# Altium PCB xem7310_carrier.PcbDoc
Units mm, origin at the board's own origin, x right, y up, seen from the top; angles counter-clockwise.
Board outline 72.85 x 75 mm, 4 copper layers (F.Cu, In1.Cu, In2.Cu, B.Cu); 26 components, 183 nets, 251 pads, 53 vias.
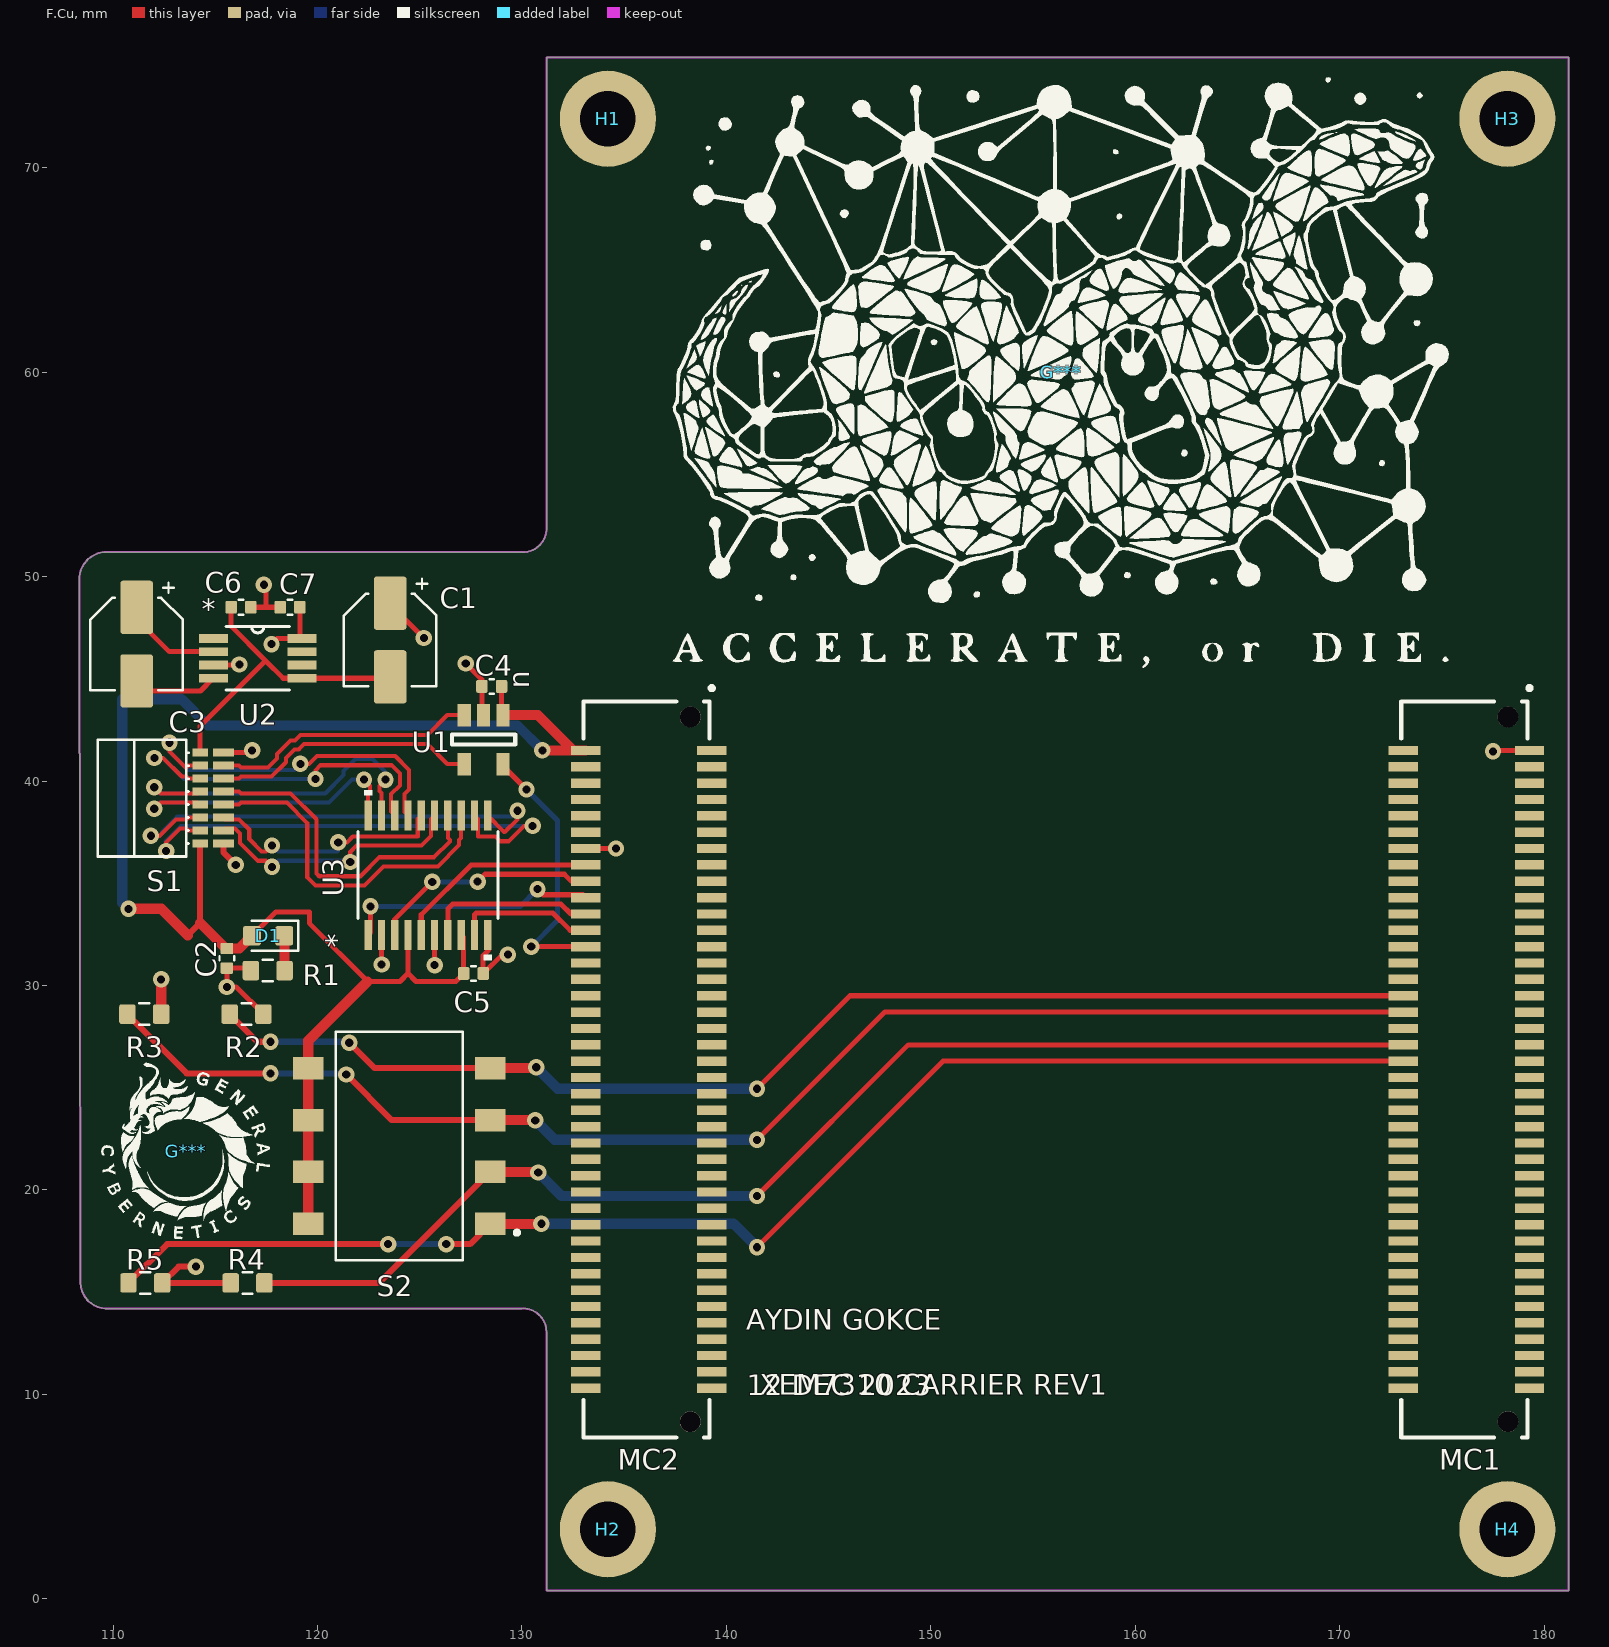
[diagram p0: F.Cu view]
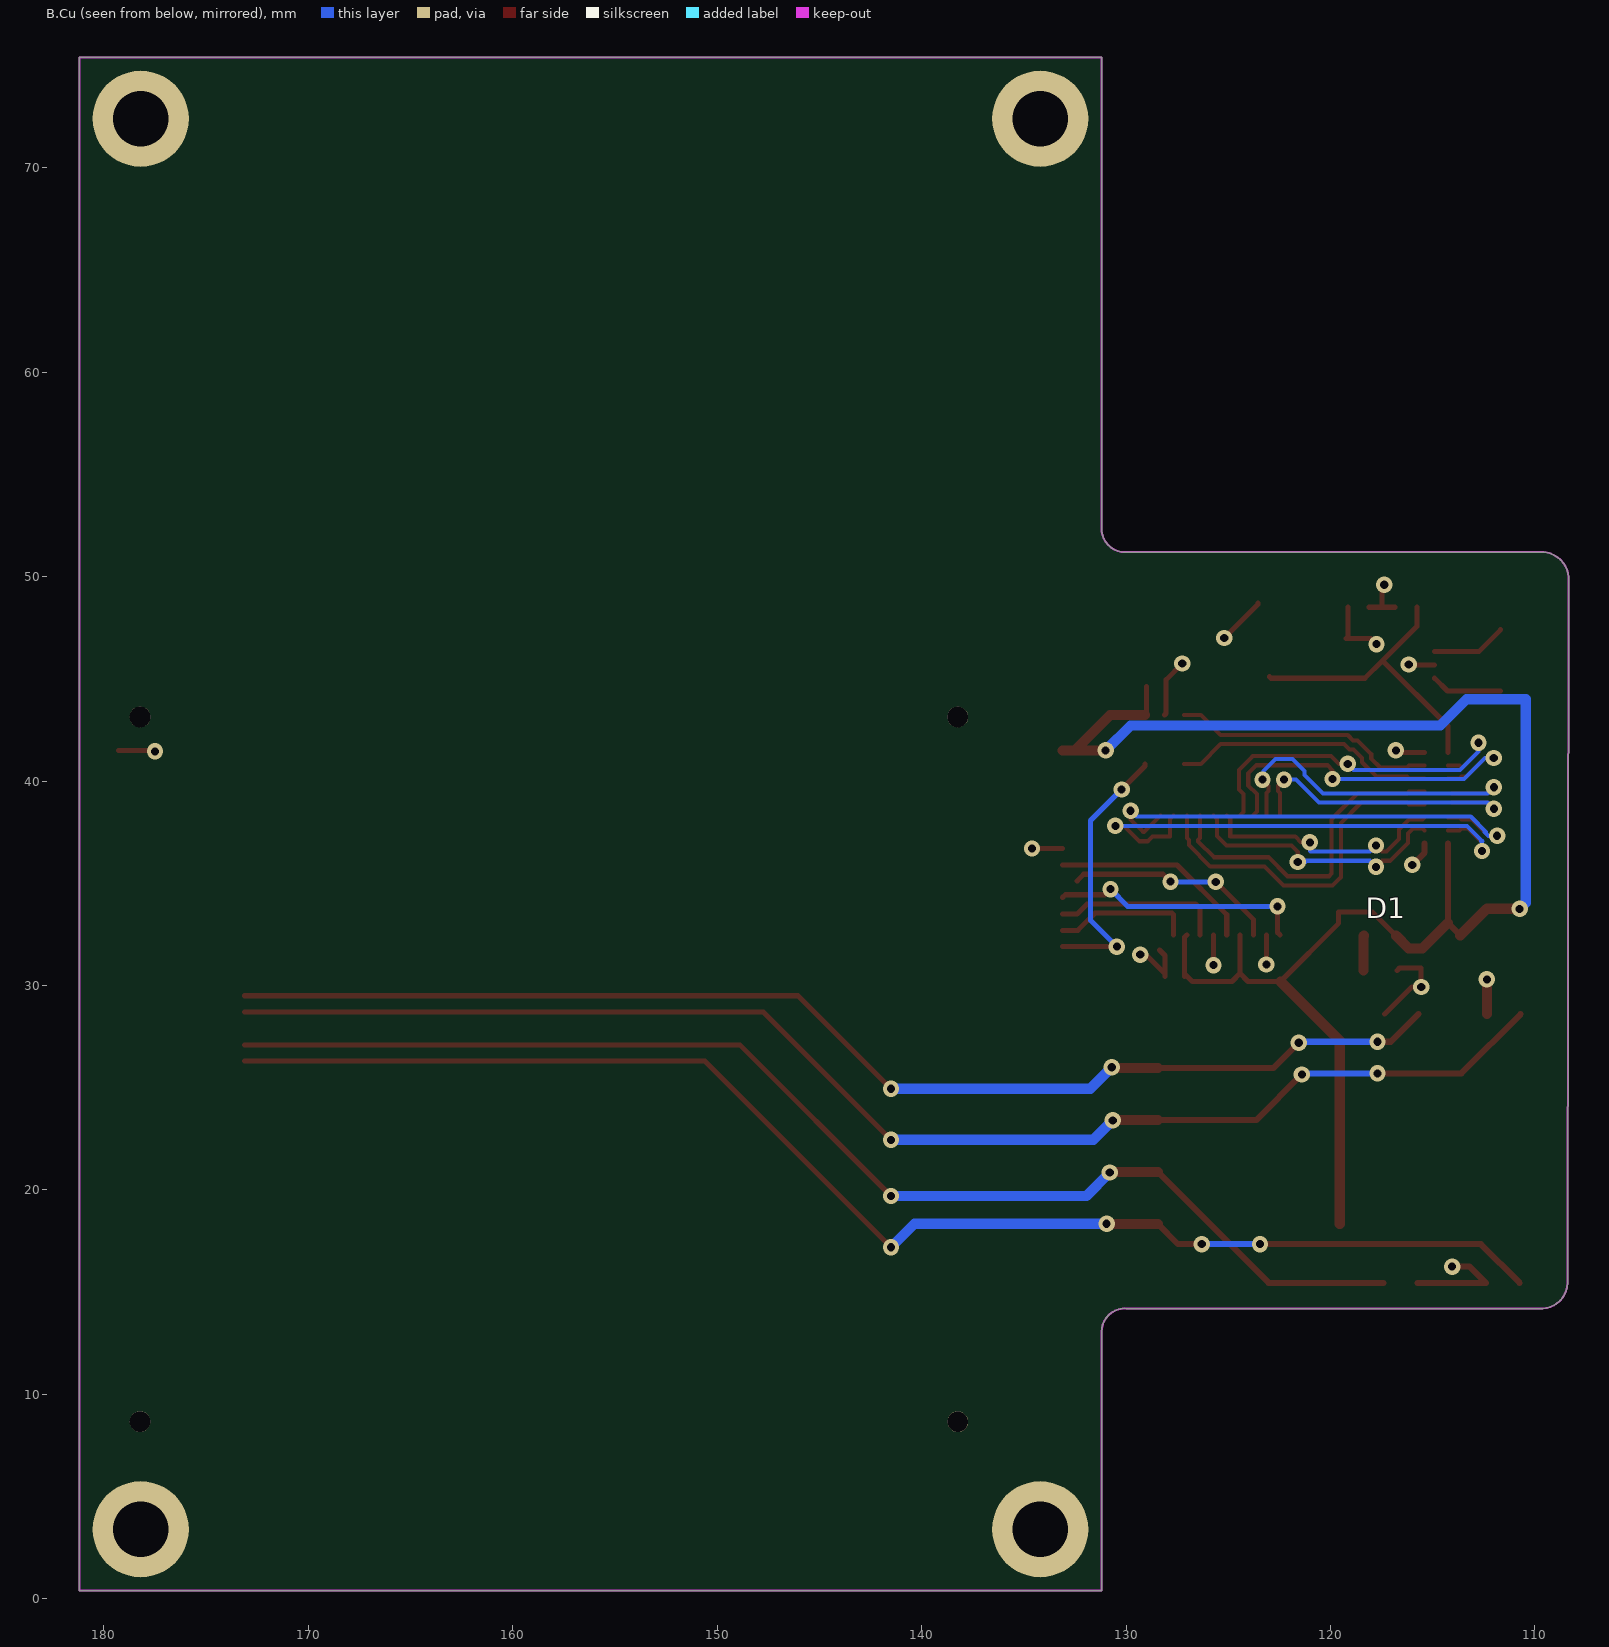
[diagram p1: B.Cu view, seen from below]
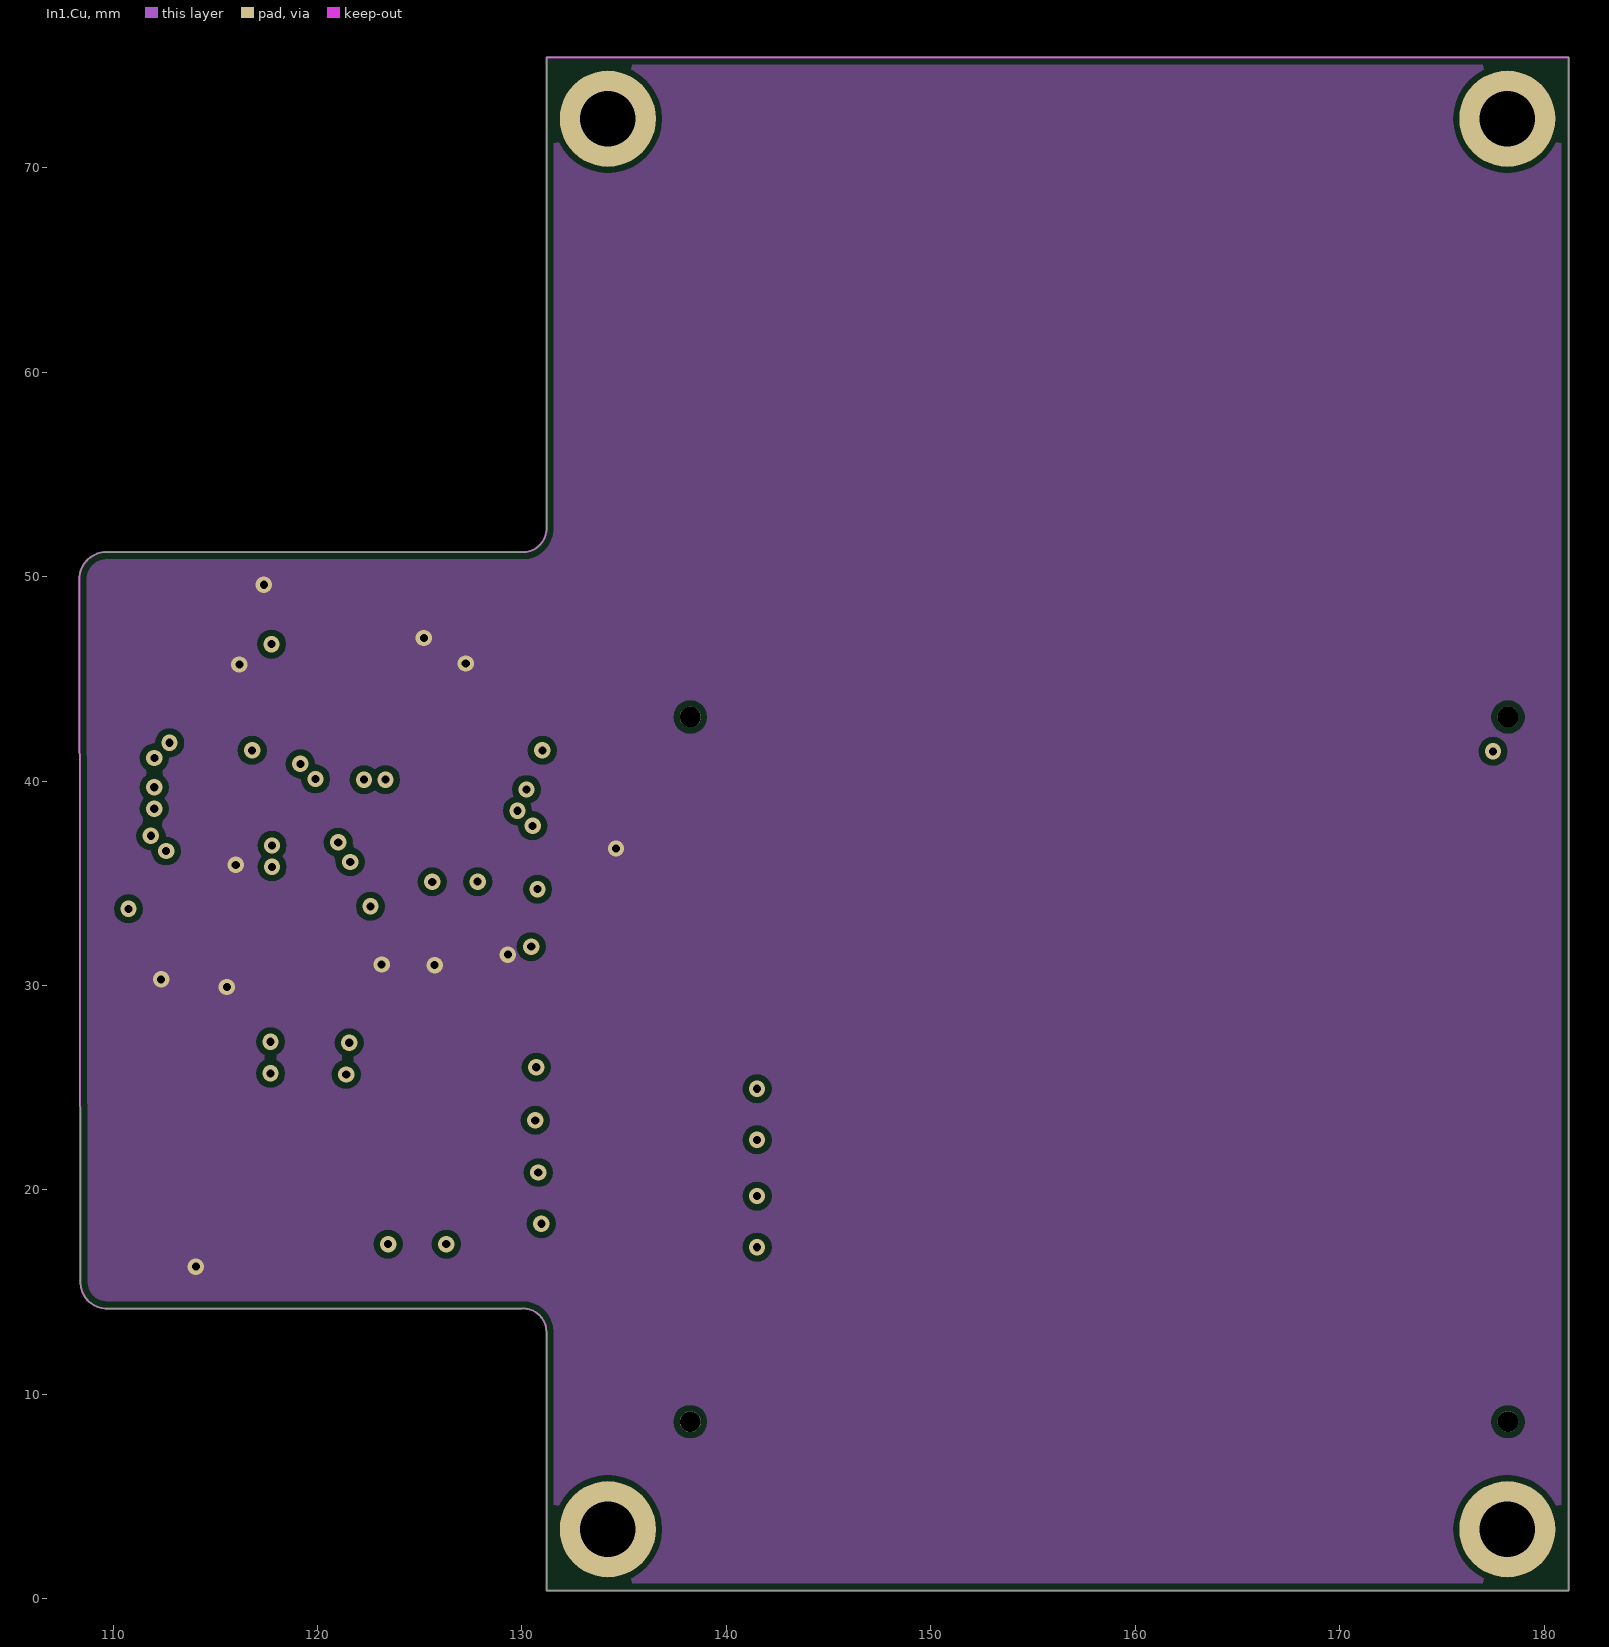
[diagram p2: In1.Cu]
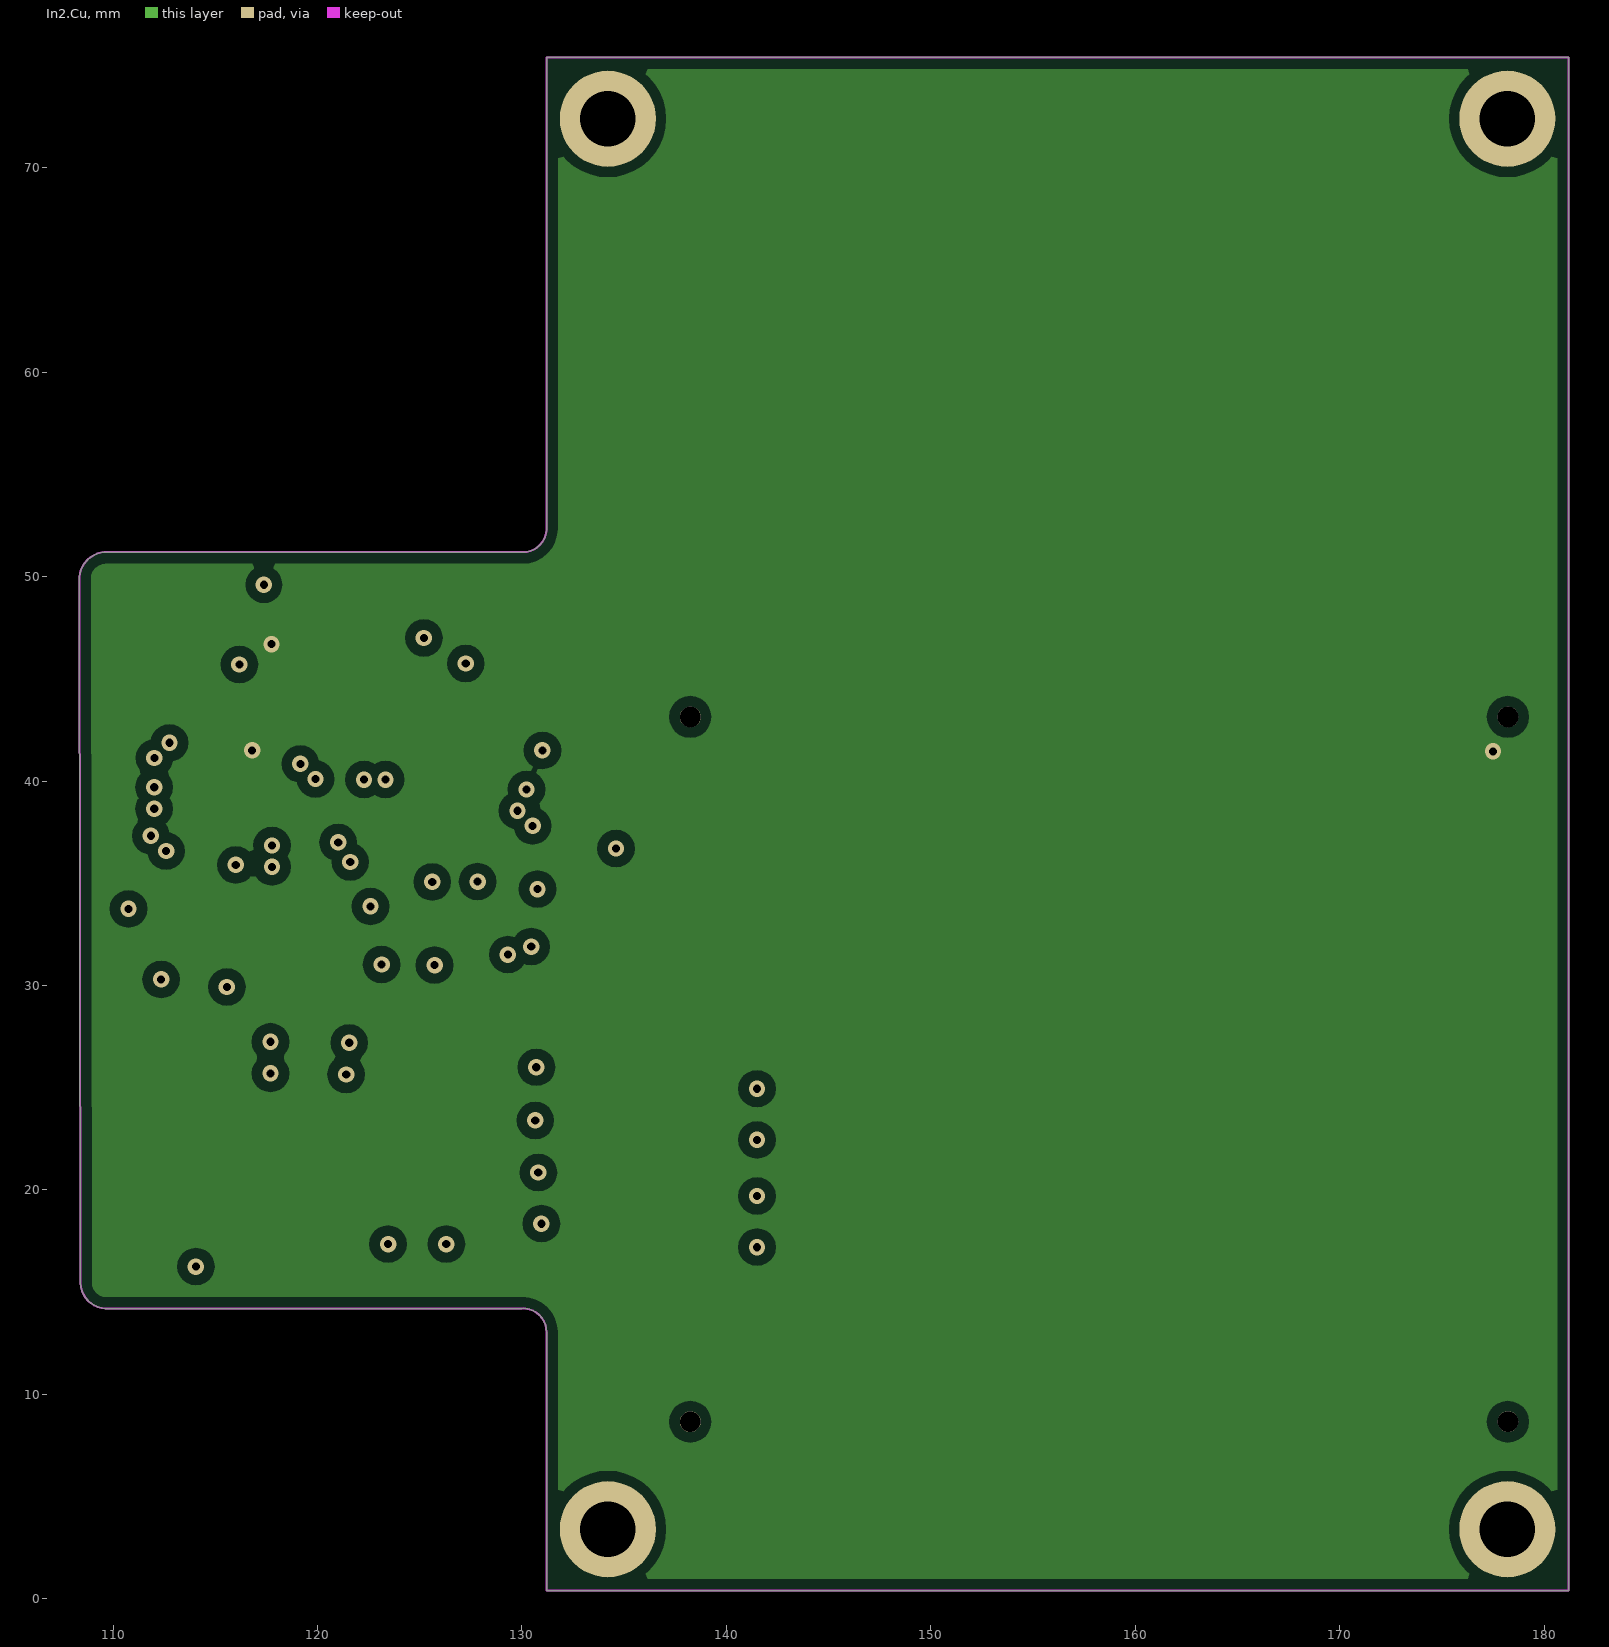
[diagram p3: In2.Cu]

## Layer stack, top to bottom
F.Mask: solder mask 0.0102, Solder Resist, Dk 3.5
F.Cu: signal copper 0.0356
Dielectric 1: dielectric 0.32, FR-4, Dk 4.8
In1.Cu: signal copper 0.0356
Dielectric2: dielectric 0.32, FR-4, Dk 4.8
In2.Cu: signal copper 0.0356
Dielectric3: dielectric 0.32, FR-4, Dk 4.8
B.Cu: signal copper 0.0356
B.Mask: solder mask 0.0102, Solder Resist, Dk 3.5

## Board outline
130.05,51.199 ccw(c130.05,52.35) 131.2,52.4 131.2,75.4 181.2,75.4 181.2,0.4 131.2,0.4 131.2,13.049 ccw(c130.047,13.049) 110.21,14.2 109.61,14.2 cw(c109.691,15.489) 108.4,15.435 108.35,49.99 cw(c109.68,49.868) 109.585,51.2 109.935,51.2 110.285,51.2 130.05,51.199

## Design rules (kind name [scope] priority, off if disabled: settings)
Clearance "Clearence 0.508_Polygon" [InNamedPolygon('In2.Cu-+5V')] p1: gap=0.508 ignorepadtopadclearanceinfootprint=FALSE
Clearance "Clearence 0.3_Polygon" [InNamedPolygon('In1.Cu-GND')] p2: gap=0.3 ignorepadtopadclearanceinfootprint=FALSE
MinimumSolderMaskSliver [All] p1: minsoldermaskwidth=0
PolygonConnect Polygon_In2.Cu-+5V_ConnectDirect [IsNamedPolygon('In2.Cu-+5V') vs IsVia] p1: connectstyle=Direct reliefconductorwidth=0.254 reliefentries=4 polygonreliefangle="90 Angle" airgapwidth=0.254
PolygonConnect Polygon_In2.Cu-+5V_ConnectRelief45 [IsNamedPolygon('In2.Cu-+5V') vs (IsThruPin or IsSMTPin) and (PadShape_AllLayers = 'Round')] p2: connectstyle=Relief reliefconductorwidth=0.508 reliefentries=4 polygonreliefangle="45 Angle" airgapwidth=0.508
PolygonConnect Polygon_In2.Cu-+5V_ConnectRelief90 [IsNamedPolygon('In2.Cu-+5V') vs (IsThruPin or IsSMTPin) and (PadShape_AllLayers <> 'Round')] p3: connectstyle=Relief reliefconductorwidth=0.508 reliefentries=4 polygonreliefangle="90 Angle" airgapwidth=0.508
PolygonConnect Polygon_In1.Cu-GND_ConnectDirect [IsNamedPolygon('In1.Cu-GND') vs IsVia] p4: connectstyle=Direct reliefconductorwidth=0.254 reliefentries=4 polygonreliefangle="90 Angle" airgapwidth=0.254
PolygonConnect Polygon_In1.Cu-GND_ConnectRelief45 [IsNamedPolygon('In1.Cu-GND') vs (IsThruPin or IsSMTPin) and (PadShape_AllLayers = 'Round')] p5: connectstyle=Relief reliefconductorwidth=0.5 reliefentries=4 polygonreliefangle="45 Angle" airgapwidth=0.5
PolygonConnect Polygon_In1.Cu-GND_ConnectRelief90 [IsNamedPolygon('In1.Cu-GND') vs (IsThruPin or IsSMTPin) and (PadShape_AllLayers <> 'Round')] p6: connectstyle=Relief reliefconductorwidth=0.5 reliefentries=4 polygonreliefangle="90 Angle" airgapwidth=0.5
RoutingVias [All] p1: holewidth=0.711 width=1.27 viastyle="Through Hole" minholewidth=0.711 minwidth=1.27 maxholewidth=0.711 maxwidth=1.27
SilkToSilkClearance [All] p1: silktosilkclearance=0
SilkToSolderMaskClearance [IsPad] p1: minsilkscreentomaskgap=0 clearancetoexposedcopper=TRUE
SolderMaskExpansion [All] p1: expansion=0.102 istentingtop=FALSE
Width [All] p1: maxlimit=10 minlimit=0.254 preferedwidth=0.254 minimp=50.000000 maximp=50.000000 favimp=50.000000
27 further rules are at their usual default settings.

## Components (designator, comment, footprint, x,y, rotation, side; value= is the part's Value field where it differs from the comment)
C1 "10u" CP_Elec_4x5.4 123.55,46.9 r270 top
C2 "0.1u" C_0402_1005Metric 115.565,31.33 r90 top
C3 "10u" CP_Elec_4x5.4 111.15,46.7 r270 top
C4 "0.1u" C_0402_1005Metric 128.52,44.63 r180 top
C5 "0.1u" C_0402_1005Metric 127.63,30.59 r180 top
C6 "0.1u" C_0402_1005Metric 116.255,48.505 r180 top
C7 "0.1u" C_0402_1005Metric 118.655,48.505 r0 top
D1 "LED_0603" LED_0603_1608Metric 117.577,32.43 r180 top
G*** "LOGO" LOGO 156.35,60 r0 top
G*** "LOGO" LOGO 113.55,21.9 r0 top
H1 "MountingHole_Pad" MountingHole_2.7mm_M2.5_DIN965_Pad 134.2,72.4 r0 top
H2 "MountingHole_Pad" MountingHole_2.7mm_M2.5_DIN965_Pad 134.2,3.4 r0 top
H3 "MountingHole_Pad" MountingHole_2.7mm_M2.5_DIN965_Pad 178.2,72.4 r0 top
H4 "MountingHole_Pad" MountingHole_2.7mm_M2.5_DIN965_Pad 178.2,3.4 r0 top
MC1 "BTE-040-01-F-D-A" SAMTEC_BTE-040-01-F-D-A 176.198,25.898 r270 top
MC2 "BTE-040-01-F-D-A" SAMTEC_BTE-040-01-F-D-A 136.198,25.898 r270 top
R1 "680" R_0603_1608Metric 117.565,30.73 r180 top
R2 "50K" R_0603_1608Metric 116.525,28.6 r0 top
R3 "50K" R_0603_1608Metric 111.525,28.6 r0 top
R4 "50K" R_0603_1608Metric 116.575,15.45 r180 top
R5 "50K" R_0603_1608Metric 111.575,15.45 r0 top
S1 "RHS2000-CABLE-DAQ-SIDE" OMNETICS_PZN-16-AA 113.242,39.17 r90 top
S2 "DS04-254-1-04BK-SMT" SW_DS04-254-1-04BK-SMT 124,22.15 r180 top
U1 "SN65LVDT2DBVR" DBV0005A_N 128.12,42.03 r270 top
U2 "TL7660CDGKR" DGK8 117.075,46.005 r0 top
U3 "SN65LVDT41PW" PW20 125.4,35.4 r90 top

## Footprints (in the part's own frame and the unit in brackets; to place one, negate y for a bottom-side part, rotate by r counter-clockwise, add the part's x,y. Pads: shape width x height; smd on the part's side, far side on the other; paste and mask are expansions set on the pad)
C_0402_1005Metric [mm]
  rrect25% 0.56x0.62 smd mask+0: 1(-0.48,0) 2(0.48,0)
  silkscreen extent -0.11,-0.36 0.11,0.36
CP_Elec_4x5.4 [mm]
  rrect16% 2.6x1.6 smd mask+0: 1(-1.8,0) 2(1.8,0)
  silkscreen extent -3,-2.26 2.26,2.26
DBV0005A_N [mm]
  rect 1.1x0.65 smd mask+0: 1(-1.2,0.95) 2(-1.2,0) 3(-1.2,-0.95) 4(1.2,-0.95) 5(1.2,0.95)
  silkscreen extent -0.25,-1.55 0.25,1.55
DGK8 [mil]
  rect 56x17 smd mask+0: 1(-85.5,38.39) 2(-85.5,12.8) 3(-85.5,-12.8) 4(-85.5,-38.39) 5(85.5,-38.39) 6(85.5,-12.8) 7(85.5,12.8) 8(85.5,38.39)
  silkscreen extent -61,-61 61,61
LED_0603_1608Metric [mm]
  rrect25% 0.875x0.95 smd mask+0: 1(-0.787,0) 2(0.787,0)
  silkscreen extent -1.49,-0.73 0.8,0.73
LOGO [mm]
  silkscreen extent -18.97,-14.45 18.98,14.42
MountingHole_2.7mm_M2.5_DIN965_Pad [mm]
  round 4.7 hole 2.7 paste-2539.97 mask+0: 1(0,0)
OMNETICS_PZN-16-AA [mil]
  rect 15x30 smd mask+4.02: B1(87.5,-40) B2(62.5,-40) B3(37.5,-40) B4(12.5,-40) B5(-12.5,-40) B6(-37.5,-40) B7(-62.5,-40) B8(-87.5,-40)
  rect 15x40 smd mask+4.02: T1(87.5,-85) T2(62.5,-85) T3(37.5,-85) T4(12.5,-85) T5(-12.5,-85) T6(-37.5,-85) T7(-62.5,-85) T8(-87.5,-85)
  silkscreen extent -113,-18 112,157
PW20 [mm]
  rect 1.462x0.355 smd mask+0: 1(-2.921,2.925) 2(-2.921,2.275) 3(-2.921,1.625) 4(-2.921,0.975) 5(-2.921,0.325) 6(-2.921,-0.325) 7(-2.921,-0.975) 8(-2.921,-1.625) 9(-2.921,-2.275) 10(-2.921,-2.925) 11(2.921,-2.925) 12(2.921,-2.275) 13(2.921,-1.625) 14(2.921,-0.975) 15(2.921,-0.325) 16(2.921,0.325) 17(2.921,0.975) 18(2.921,1.625) 19(2.921,2.275) 20(2.921,2.925)
  silkscreen extent -4.16,-3.43 4.16,3.43
R_0603_1608Metric [mm]
  rrect25% 0.8x0.95 smd mask+0: 1(-0.825,0) 2(0.825,0)
  silkscreen extent -0.24,-0.52 0.24,0.52
SAMTEC_BTE-040-01-F-D-A [mm]
  rect 0.457x1.44 smd mask+0.102: 01(-15.6,3.086) 02(-15.6,-3.086) 03(-14.8,3.086) 04(-14.8,-3.086) 05(-14,3.086) 06(-14,-3.086) 07(-13.2,3.086) 08(-13.2,-3.086) 09(-12.4,3.086) 10(-12.4,-3.086) 11(-11.6,3.086) 12(-11.6,-3.086) 13(-10.8,3.086) 14(-10.8,-3.086) 15(-10,3.086) 16(-10,-3.086) 17(-9.2,3.086) 18(-9.2,-3.086) 19(-8.4,3.086) 20(-8.4,-3.086) 21(-7.6,3.086) 22(-7.6,-3.086) 23(-6.8,3.086) 24(-6.8,-3.086) 25(-6,3.086) 26(-6,-3.086) 27(-5.2,3.086) 28(-5.2,-3.086) 29(-4.4,3.086) 30(-4.4,-3.086) 31(-3.6,3.086) 32(-3.6,-3.086) 33(-2.8,3.086) 34(-2.8,-3.086) 35(-2,3.086) 36(-2,-3.086) 37(-1.2,3.086) 38(-1.2,-3.086) 39(-0.4,3.086) 40(-0.4,-3.086) 41(0.4,3.086) 42(0.4,-3.086) 43(1.2,3.086) 44(1.2,-3.086) 45(2,3.086) 46(2,-3.086) 47(2.8,3.086) 48(2.8,-3.086) 49(3.6,3.086) 50(3.6,-3.086) 51(4.4,3.086) 52(4.4,-3.086) 53(5.2,3.086) 54(5.2,-3.086) 55(6,3.086) 56(6,-3.086) 57(6.8,3.086) 58(6.8,-3.086) 59(7.6,3.086) 60(7.6,-3.086) 61(8.4,3.086) 62(8.4,-3.086) 63(9.2,3.086) 64(9.2,-3.086) 65(10,3.086) 66(10,-3.086) 67(10.8,3.086) 68(10.8,-3.086) 69(11.6,3.086) 70(11.6,-3.086) 71(12.4,3.086) 72(12.4,-3.086) 73(13.2,3.086) 74(13.2,-3.086) 75(14,3.086) 76(14,-3.086) 77(14.8,3.086) 78(14.8,-3.086) 79(15.6,3.086) 80(15.6,-3.086)
  round 1.016 hole 1.016 paste-2539.97 mask+0: Un1(-17.238,2.032) Un2(17.238,2.032)
  silkscreen extent -18.75,-3.19 18,3.19
SW_DS04-254-1-04BK-SMT [mm]
  rect 1.5x1.1 smd mask+0.102: 1A(-4.45,3.81) 1B(4.45,3.81) 2A(-4.45,1.27) 2B(4.45,1.27) 3A(-4.45,-1.27) 3B(4.45,-1.27) 4A(-4.45,-3.81) 4B(4.45,-3.81)
  silkscreen extent -5.85,-5.58 3.1,5.58

## Part data
C1 C3: library part CP_Elec_4x5.4, "SMD capacitor, aluminum electrolytic, Panasonic A5 / Nichicon, 4.0x5.4mm", Sheetfile=xem7310_carrier.kicad_sch
C2 C4 C5 C6 C7: library part C_0402_1005Metric, "Capacitor SMD 0402 (1005 Metric), square (rectangular) end terminal, IPC_7351 nominal, (Body size source: IPC-SM-782 page 76, https://www.pcb-3d.com/wordpress/wp-content/uploads/ipc-sm-782a_amendment_1_and_2.pdf), generated with kicad-footprint-generator", Sheetfile=xem7310_carrier.kicad_sch
D1: library part LED_0603_1608Metric, "LED SMD 0603 (1608 Metric), square (rectangular) end terminal, IPC_7351 nominal, (Body size source: http://www.tortai-tech.com/upload/download/2011102023233369053.pdf), generated with kicad-footprint-generator", Sheetfile=xem7310_carrier.kicad_sch
H1 H2 H3 H4: library part MountingHole_2.7mm_M2.5_DIN965_Pad, "Mounting Hole 2.7mm, M2.5, DIN965", Sheetfile=xem7310_carrier.kicad_sch
MC1 MC2: library part SAMTEC_BTE-040-01-F-D-A, MANUFACTURER=Samtec, PARTREV=R, STANDARD="Manufacturer Recommendations", Sheetfile=xem7310_carrier.kicad_sch
R1 R2 R3 R4 R5: library part R_0603_1608Metric, "Resistor SMD 0603 (1608 Metric), square (rectangular) end terminal, IPC_7351 nominal, (Body size source: IPC-SM-782 page 72, https://www.pcb-3d.com/wordpress/wp-content/uploads/ipc-sm-782a_amendment_1_and_2.pdf), generated with kicad-footprint-generator", Sheetfile=xem7310_carrier.kicad_sch
S1: library part OMNETICS_PZN-16-AA, Sheetfile=xem7310_carrier.kicad_sch
S2: library part SW_DS04-254-1-04BK-SMT, MANUFACTURER="CUI Inc.", MAXIMUM_PACKAGE_HEIGHT="4.86 mm", Package=None, Availability="In Stock", CUI_purchase_URL=https://www.cuidevices.com/product/switches/dip-switches/ds04-254-1-04bk-smt?utm_source=snapeda.com&utm_medium=referral&utm_campaign=snapedaBOM, Check_prices=https://www.snapeda.com/parts/DS04-254-1-04BK-SMT/CUI+Devices/view-part/?ref=eda, Description="4 Position, Surface Mount, 2.54 mm Pitch, Raised Slide Actuator, Flat Bottom, SMT Pin, DIP Switch", MF="CUI Devices", MP=DS04-254-1-04BK-SMT, PARTREV=V0.0, Price=None, Purchase-URL="https://www.snapeda.com/api/url_track_click_mouser/?unipart_id=4467256&manufacturer=CUI Devices&part_name=DS04-254-1-04BK-SMT&search_term=None", STANDARD="Manufacturer Recommendations", Sheetfile=xem7310_carrier.kicad_sch, SnapEDA_Link=https://www.snapeda.com/parts/DS04-254-1-04BK-SMT/CUI+Devices/view-part/?ref=snap
U1: library part DBV0005A_N, Sheetfile=xem7310_carrier.kicad_sch
U2: library part DGK8, Sheetfile=xem7310_carrier.kicad_sch
U3: library part PW20, Sheetfile=xem7310_carrier.kicad_sch

## Via types
v1: diameter 0.8, hole 0.4, F.Cu to B.Cu, tented both sides, 53 vias

## Nets (pads, with @x,y where several pads share a name; then routed paths per layer and width w, separated by ;. In a path a pad name is that pad's centre, name@x,y a point inside that pad or via, vN(x,y) a via of type N, cw(c..) or ccw(c..) an arc to the next point about the centre after c; other vN are vias at no path point)
+3.3V: C2.2 C4.1 C5.2 D1.2 MC2.02 S1.B8 S2.1B S2.2B S2.3B S2.4B U1.1 U3.4 U3.8 | length 81.8
  F.Cu w0.25: D1.2 117.96,33.6 119.6,33.6 119.6,33.05 122.45,30.2 124.03,30.2 124.425,30.595 ; U3.4 124.425,30.595 ; U3.8 127.14,32.364 C5.2@127.14,30.45 ; C5.2 126.76,30.2 124.82,30.2 124.425,30.595 ; C4.1 129,43.3 U1.1
  F.Cu w0.3: 113.65,32.45 114.258,33.058 S1.B8
  F.Cu w0.5: v1(110.75,33.75) 112.35,33.75 113.65,32.45 ; 114.258,33.058 115.506,31.81 C2.2 116.17,31.81 D1.2 ; S2.1B S2.4B 119.55,27.3 122.45,30.2 ; U1.1 130.77,43.23 132.502,41.498 MC2.02 131.002,41.498 v1(131,41.5)
  B.Cu w0.5: v1(110.75,33.75) 110.45,34.05 110.45,44 113.35,44 114.629,42.721 129.779,42.721 v1(131,41.5)
+5V: C7.2 MC1.01 S1.T1 U2.8 | length 6.4
  F.Cu w0.25: S1.T1 116.692,41.393 v1(116.8,41.5) ; v1(117.75,46.7) 118.03,46.98 U2.8 ; U2.8@119.135,46.972 C7.2 ; v1(177.5,41.45) 177.548,41.498 MC1.01
-5V: C1.2 C6.2 S1.B1 U2.5 | length 15
  F.Cu w0.25: S1.B1 114.258,42.688 117.46,45.89 ; C6.2 115.775,47.575 117.46,45.89 ; C1.2@122.975,45.105 122.9,45.03 U2.5 118.32,45.03 117.46,45.89
CS+: S1.T6 U3.16 | length 12.4
  F.Cu w0.2: S1.T6 115.494,38.125 116.159,38.125 116.659,37.624 116.659,37.159 117.267,36.551 117.475,36.551 v1(117.775,36.851) ; v1(121.009,37.001) 121.433,37.001 121.722,37.29 123.948,37.29 ; 123.948,37.29 124.902,37.29 124.902,38.135 125.075,38.307 U3.16
  B.Cu w0.2: v1(117.775,36.851) 118.075,36.551 120.983,36.551 121.009,36.577 v1(121.009,37.001)
CS-: S1.T7 U3.15 | length 13.3
  F.Cu w0.2: S1.T7 115.494,37.675 115.972,37.675 116.209,37.438 116.209,36.973 117.081,36.101 117.475,36.101 v1(117.775,35.801) ; v1(121.6,36.044) 121.6,36.532 121.909,36.841 123.761,36.841 ; 123.761,36.84 125.089,36.84 125.552,37.304 125.552,38.148 U3.15
  B.Cu w0.2: v1(117.775,35.801) 118.075,36.101 121.169,36.101 121.226,36.044 v1(121.6,36.044)
CS_A: MC2.16 U3.5 | length 10
  F.Cu w0.25: U3.5 125.075,33.46 127.513,35.898 MC2.16
GND: C1.1 C2.1 C4.2 C5.1 C6.1 C7.1 MC2.14 R1.2 R2.2 R3.2 R4.2 R5.2 S1.T8 U1.2 U2.3 U3.2 U3.6 U3.10 | length 29.2
  F.Cu w0.25: U2.3 116.15,45.68 v1(116.175,45.705) ; R1.2 116.62,30.85 C2.1 v1(115.565,29.93) 116.02,29.93 R2.2 ; C6.1@116.855,48.505 117.475,48.505 ; v1(117.375,49.605) 117.475,49.505 117.475,48.505 ; C7.1@118.115,48.505 117.475,48.505 ; U3.2 123.125,31.035 v1(123.135,31.025) ; C1.1 123.55,48.65 v1(125.2,47) ; v1(125.725,30.995) U3.6 ; v1(127.25,45.75) 128.04,44.96 C4.2 128.04,43.31 U1.2 ; C5.1@128.1,30.45 128.1,31.47 128.37,31.74 ; C5.1 129.03,31.51 v1(129.31,31.51) ; MC2.14 134.598,36.698 v1(134.6,36.7)
  F.Cu w0.3: v1(114.05,16.25) 113.2,16.25 R5.2 R4.2 ; S1.T8 115.401,36.499 v1(116,35.9)
  F.Cu w0.5: R3.2 v1(112.35,30.3)
MISO1+: S1.B7 U3.12 | length 25.4
  F.Cu w0.2: v1(112.591,36.579) 112.591,37.003 113.263,37.675 113.594,37.675 113.687,37.583 S1.B7 ; U3.12 127.848,38.148 127.848,37.29 128.706,37.29 128.941,37.055 129.344,37.055 130.097,37.808 v1(130.521,37.808)
  B.Cu w0.2: v1(112.591,36.579) 112.591,37.003 112.643,37.055 112.573,37.055 113.326,37.808 v1(130.521,37.808)
MISO1-: S1.B6 U3.11 | length 23.8
  F.Cu w0.2: v1(111.849,37.321) 112.273,37.321 113.077,38.125 113.594,38.125 113.687,38.218 S1.B6 ; U3.11 128.325,38.307 129.127,37.505 129.158,37.505 129.779,38.126 v1(129.779,38.55)
  B.Cu w0.2: v1(111.849,37.321) 112.273,37.321 112.457,37.505 112.387,37.505 113.139,38.258 129.486,38.258 v1(129.779,38.55)
MISO2+: S1.T2 U1.3 | length 13
  F.Cu w0.2: S1.T2 116.163,40.758 116.256,40.665 117.567,40.665 118.009,41.107 118.009,41.318 118.682,41.991 118.893,41.991 119.157,42.255 125.37,42.255 126.345,43.23 U1.3
MISO2-: S1.T3 U1.4 | length 13
  F.Cu w0.2: S1.T3 116.163,40.123 116.256,40.215 117.753,40.215 118.459,40.921 118.459,41.131 118.869,41.541 119.079,41.541 119.343,41.805 125.37,41.805 126.345,40.83 U1.4
MISO_A1: MC2.24 U3.9 | length 6.8
  F.Cu w0.25: U3.9 127.675,33.46 127.755,33.54 131.52,33.54 132.362,32.698 MC2.24
MISO_A2: MC2.26 U1.5 | length 13.2
  F.Cu w0.25: U1.5 129.07,40.74 v1(130.22,39.59) ; v1(130.45,31.9) 130.452,31.898 MC2.26
  B.Cu w0.25: v1(130.22,39.59) 131.74,38.07 131.74,33.37 131.74,33.19 v1(130.45,31.9)
MOSI1+: S1.B5 U3.20 | length 15
  F.Cu w0.2: v1(112.01,38.645) 112.31,38.945 S1.B5@114.09,38.945 ; v1(122.275,40.073) 122.575,39.773 122.575,39.518 122.475,39.418 U3.20
  B.Cu w0.2: v1(112.01,38.645) 112.31,38.945 120.563,38.945 121.691,40.073 v1(122.275,40.073)
MOSI1-: S1.B4 U3.19 | length 17
  F.Cu w0.2: v1(112.01,39.695) 112.31,39.395 S1.B4@114.09,39.395 ; U3.19 123.125,39.418 123.025,39.518 123.025,39.773 v1(123.325,40.073)
  B.Cu w0.2: v1(112.01,39.695) 112.31,39.395 120.377,39.395 121.275,40.293 121.275,40.487 121.861,41.073 122.689,41.073 123.275,40.487 123.275,40.123 v1(123.325,40.073)
MOSI2+: S1.T4 U3.14 | length 16.4
  F.Cu w0.2: S1.T4 116.163,39.488 116.256,39.395 118.683,39.395 119.945,38.133 119.945,35.483 120.083,35.345 122.107,35.345 123.037,36.275 125.698,36.275 126.475,37.052 126.475,37.125 126.375,37.225 U3.14
MOSI2-: S1.T5 U3.13 | length 17.1
  F.Cu w0.2: S1.T5 116.163,38.853 116.256,38.945 118.497,38.945 119.495,37.947 119.495,35.297 119.897,34.895 122.293,34.895 123.223,35.825 125.884,35.825 126.925,36.866 126.925,37.125 127.025,37.225 U3.13
MOSI_A1: MC2.20 U3.1 | length 12.5
  F.Cu w0.25: U3.1 122.59,32.594 v1(122.59,33.87) ; v1(130.76,34.715) 131.035,34.44 132.97,34.44 MC2.20
  B.Cu w0.25: v1(122.59,33.87) 129.916,33.87 v1(130.76,34.715)
MOSI_A2: MC2.22 U3.7 | length 8.3
  F.Cu w0.25: U3.7 126.375,33.755 126.61,33.99 131.9,33.99 132.392,33.498 MC2.22
Net-(C3-Pad1): C3.1 U2.2 | length 3.7
  F.Cu w0.25: C3.1@111.675,47.405 112.75,46.33 U2.2
Net-(C3-Pad2): C3.2 U2.4 | length 3.5
  F.Cu w0.25: C3.2@111.675,44.405 114.278,44.405 U2.4
Net-(MC1-Pad32): MC1.32 R2.1 S2.4A | length 60.8
  F.Cu w0.25: v1(141.5,24.95) 146.048,29.498 MC1.32
  F.Cu w0.3: R2.1 117.05,27.25 v1(117.7,27.25) ; v1(121.55,27.2) 122.79,25.96 S2.4A
  F.Cu w0.5: S2.4A 130.66,25.96 v1(130.7,26)
  B.Cu w0.3: v1(117.7,27.25) 121.5,27.25 v1(121.55,27.2)
  B.Cu w0.5: v1(130.7,26) 131.75,24.95 v1(141.5,24.95)
Net-(MC1-Pad34): MC1.34 R3.1 S2.3A | length 67.5
  F.Cu w0.25: v1(141.5,22.45) 147.75,28.7 171.75,28.7 171.752,28.698 MC1.34
  F.Cu w0.3: R3.1 113.6,25.7 v1(117.7,25.7) ; v1(121.4,25.65) 123.63,23.42 S2.3A
  F.Cu w0.5: S2.3A 130.63,23.42 v1(130.65,23.4)
  B.Cu w0.3: v1(117.7,25.7) 121.35,25.7 v1(121.4,25.65)
  B.Cu w0.5: v1(130.65,23.4) 131.6,22.45 v1(141.5,22.45)
Net-(MC1-Pad38): MC1.38 R4.1 S2.2A | length 61.5
  F.Cu w0.25: v1(141.5,19.7) 148.898,27.098 MC1.38
  F.Cu w0.3: R4.1 123.02,15.45 S2.2A
  F.Cu w0.5: S2.2A 130.77,20.88 v1(130.8,20.85)
  B.Cu w0.5: v1(130.8,20.85) 131.95,19.7 v1(141.5,19.7)
Net-(MC1-Pad40): MC1.40 R5.1 S2.1A | length 67.8
  F.Cu w0.25: v1(141.5,17.2) 150.598,26.298 MC1.40
  F.Cu w0.3: R5.1 112.65,17.35 v1(123.45,17.35) ; v1(126.3,17.35) 127.46,17.35 S2.1A
  F.Cu w0.5: S2.1A 130.94,18.34 v1(130.95,18.35)
  B.Cu w0.3: v1(123.45,17.35) v1(126.3,17.35)
  B.Cu w0.5: v1(130.95,18.35) 140.35,18.35 v1(141.5,17.2)
Net-(R1-Pad1): D1.1 R1.1 | length 1.7
  F.Cu w0.5: D1.1 118.39,32.405 R1.1
SCK_A: MC2.18 U3.3 | length 10.4
  F.Cu w0.25: U3.3 123.775,33.235 v1(125.61,35.07) ; v1(127.83,35.08) 128.189,35.439 132.071,35.439 132.39,35.12
  B.Cu w0.25: v1(125.61,35.07) 127.82,35.07 v1(127.83,35.08)
SCLK+: S1.B3 U3.18 | length 18.1
  F.Cu w0.2: v1(112.019,41.129) 112.443,41.129 113.357,40.215 113.594,40.215 113.687,40.123 S1.B3 ; v1(119.901,40.099) 119.901,40.523 120.153,40.775 123.613,40.775 124.025,40.363 124.025,39.783 123.602,39.36 123.602,38.507 123.775,38.335 U3.18
  B.Cu w0.2: v1(112.019,41.129) 112.443,41.129 113.473,40.099 v1(119.901,40.099)
SCLK-: S1.B2 U3.17 | length 17.7
  F.Cu w0.2: v1(112.761,41.871) 112.761,41.447 113.543,40.665 113.594,40.665 113.687,40.758 S1.B2 ; v1(119.159,40.841) 119.583,40.841 119.967,41.225 121.521,41.225 121.523,41.223 123.801,41.223 124.475,40.549 124.475,39.596 124.252,39.374 124.252,38.494 U3.17
  B.Cu w0.2: v1(112.761,41.871) 112.761,41.447 113.659,40.549 118.866,40.549 v1(119.159,40.841)
unconnected-(H1-Pad1): H1.1
unconnected-(H2-Pad1): H2.1
unconnected-(H3-Pad1): H3.1
unconnected-(H4-Pad1): H4.1
unconnected-(MC1-Pad02): MC1.02
unconnected-(MC1-Pad03): MC1.03
unconnected-(MC1-Pad04): MC1.04
unconnected-(MC1-Pad05): MC1.05
unconnected-(MC1-Pad06): MC1.06
unconnected-(MC1-Pad07): MC1.07
unconnected-(MC1-Pad08): MC1.08
unconnected-(MC1-Pad09): MC1.09
unconnected-(MC1-Pad10): MC1.10
unconnected-(MC1-Pad11): MC1.11
unconnected-(MC1-Pad12): MC1.12
unconnected-(MC1-Pad13): MC1.13
unconnected-(MC1-Pad14): MC1.14
unconnected-(MC1-Pad15): MC1.15
unconnected-(MC1-Pad16): MC1.16
unconnected-(MC1-Pad17): MC1.17
unconnected-(MC1-Pad18): MC1.18
unconnected-(MC1-Pad19): MC1.19
unconnected-(MC1-Pad20): MC1.20
unconnected-(MC1-Pad21): MC1.21
unconnected-(MC1-Pad22): MC1.22
unconnected-(MC1-Pad23): MC1.23
unconnected-(MC1-Pad24): MC1.24
unconnected-(MC1-Pad25): MC1.25
unconnected-(MC1-Pad26): MC1.26
unconnected-(MC1-Pad27): MC1.27
unconnected-(MC1-Pad28): MC1.28
unconnected-(MC1-Pad29): MC1.29
unconnected-(MC1-Pad30): MC1.30
unconnected-(MC1-Pad31): MC1.31
unconnected-(MC1-Pad33): MC1.33
unconnected-(MC1-Pad35): MC1.35
unconnected-(MC1-Pad36): MC1.36
unconnected-(MC1-Pad37): MC1.37
unconnected-(MC1-Pad39): MC1.39
unconnected-(MC1-Pad41): MC1.41
unconnected-(MC1-Pad42): MC1.42
unconnected-(MC1-Pad43): MC1.43
unconnected-(MC1-Pad44): MC1.44
unconnected-(MC1-Pad45): MC1.45
unconnected-(MC1-Pad46): MC1.46
unconnected-(MC1-Pad47): MC1.47
unconnected-(MC1-Pad48): MC1.48
unconnected-(MC1-Pad49): MC1.49
unconnected-(MC1-Pad50): MC1.50
unconnected-(MC1-Pad51): MC1.51
unconnected-(MC1-Pad52): MC1.52
unconnected-(MC1-Pad53): MC1.53
unconnected-(MC1-Pad54): MC1.54
unconnected-(MC1-Pad55): MC1.55
unconnected-(MC1-Pad56): MC1.56
unconnected-(MC1-Pad57): MC1.57
unconnected-(MC1-Pad58): MC1.58
unconnected-(MC1-Pad59): MC1.59
unconnected-(MC1-Pad60): MC1.60
unconnected-(MC1-Pad61): MC1.61
unconnected-(MC1-Pad62): MC1.62
unconnected-(MC1-Pad63): MC1.63
unconnected-(MC1-Pad64): MC1.64
unconnected-(MC1-Pad65): MC1.65
unconnected-(MC1-Pad66): MC1.66
unconnected-(MC1-Pad67): MC1.67
unconnected-(MC1-Pad68): MC1.68
unconnected-(MC1-Pad69): MC1.69
unconnected-(MC1-Pad70): MC1.70
unconnected-(MC1-Pad71): MC1.71
unconnected-(MC1-Pad72): MC1.72
unconnected-(MC1-Pad73): MC1.73
unconnected-(MC1-Pad74): MC1.74
unconnected-(MC1-Pad75): MC1.75
unconnected-(MC1-Pad76): MC1.76
unconnected-(MC1-Pad77): MC1.77
unconnected-(MC1-Pad78): MC1.78
unconnected-(MC1-Pad79): MC1.79
unconnected-(MC1-Pad80): MC1.80
unconnected-(MC2-Pad01): MC2.01
unconnected-(MC2-Pad03): MC2.03
unconnected-(MC2-Pad04): MC2.04
unconnected-(MC2-Pad05): MC2.05
unconnected-(MC2-Pad06): MC2.06
unconnected-(MC2-Pad07): MC2.07
unconnected-(MC2-Pad08): MC2.08
unconnected-(MC2-Pad09): MC2.09
unconnected-(MC2-Pad10): MC2.10
unconnected-(MC2-Pad11): MC2.11
unconnected-(MC2-Pad12): MC2.12
unconnected-(MC2-Pad13): MC2.13
unconnected-(MC2-Pad15): MC2.15
unconnected-(MC2-Pad17): MC2.17
unconnected-(MC2-Pad19): MC2.19
unconnected-(MC2-Pad21): MC2.21
unconnected-(MC2-Pad23): MC2.23
unconnected-(MC2-Pad25): MC2.25
unconnected-(MC2-Pad27): MC2.27
unconnected-(MC2-Pad28): MC2.28
unconnected-(MC2-Pad29): MC2.29
unconnected-(MC2-Pad30): MC2.30
unconnected-(MC2-Pad31): MC2.31
unconnected-(MC2-Pad32): MC2.32
unconnected-(MC2-Pad33): MC2.33
unconnected-(MC2-Pad34): MC2.34
unconnected-(MC2-Pad35): MC2.35
unconnected-(MC2-Pad36): MC2.36
unconnected-(MC2-Pad37): MC2.37
unconnected-(MC2-Pad38): MC2.38
unconnected-(MC2-Pad39): MC2.39
unconnected-(MC2-Pad40): MC2.40
unconnected-(MC2-Pad41): MC2.41
unconnected-(MC2-Pad42): MC2.42
unconnected-(MC2-Pad43): MC2.43
unconnected-(MC2-Pad44): MC2.44
unconnected-(MC2-Pad45): MC2.45
unconnected-(MC2-Pad46): MC2.46
unconnected-(MC2-Pad47): MC2.47
unconnected-(MC2-Pad48): MC2.48
unconnected-(MC2-Pad49): MC2.49
unconnected-(MC2-Pad50): MC2.50
unconnected-(MC2-Pad51): MC2.51
unconnected-(MC2-Pad52): MC2.52
unconnected-(MC2-Pad53): MC2.53
unconnected-(MC2-Pad54): MC2.54
unconnected-(MC2-Pad55): MC2.55
unconnected-(MC2-Pad56): MC2.56
unconnected-(MC2-Pad57): MC2.57
unconnected-(MC2-Pad58): MC2.58
unconnected-(MC2-Pad59): MC2.59
unconnected-(MC2-Pad60): MC2.60
unconnected-(MC2-Pad61): MC2.61
unconnected-(MC2-Pad62): MC2.62
unconnected-(MC2-Pad63): MC2.63
unconnected-(MC2-Pad64): MC2.64
unconnected-(MC2-Pad65): MC2.65
unconnected-(MC2-Pad66): MC2.66
unconnected-(MC2-Pad67): MC2.67
unconnected-(MC2-Pad68): MC2.68
unconnected-(MC2-Pad69): MC2.69
unconnected-(MC2-Pad70): MC2.70
unconnected-(MC2-Pad71): MC2.71
unconnected-(MC2-Pad72): MC2.72
unconnected-(MC2-Pad73): MC2.73
unconnected-(MC2-Pad74): MC2.74
unconnected-(MC2-Pad75): MC2.75
unconnected-(MC2-Pad76): MC2.76
unconnected-(MC2-Pad77): MC2.77
unconnected-(MC2-Pad78): MC2.78
unconnected-(MC2-Pad79): MC2.79
unconnected-(MC2-Pad80): MC2.80
unconnected-(U2-Pad1): U2.1
unconnected-(U2-Pad6): U2.6
unconnected-(U2-Pad7): U2.7
pads on no net: MC1.Un1 MC1.Un2 MC2.Un1 MC2.Un2

## Polygon pours and split planes (outlines as drawn)
GND on In1.Cu "In1.Cu-GND" (solid, remove dead copper, pour order 0): 181.5,0.1 130.6,0 130.55,13.3 108.15,13.3 108.15,51.95 130.45,51.95 130.449,75.692 181.5,75.7
+5V on In2.Cu "In2.Cu-+5V" (solid, remove dead copper, pour order 1): 181.5,0.1 130.6,0 130.55,13.3 108.15,13.3 108.15,51.95 130.45,51.95 130.45,75.7 181.5,75.7

## Keep-outs
Edge.Cuts:
  lines w0.1: 181.2,75.35 181.2,75.4 ; 108.35,49.99 cw(c109.68,49.868) 109.585,51.2 ; 108.35,49.99 cw(c109.68,49.868) 109.585,51.2 ; 108.35,49.99 108.4,15.435 ; 108.35,49.99 108.4,15.435 ; 108.4,15.435 ccw(c109.691,15.489) 109.61,14.2 ; 108.4,15.435 ccw(c109.691,15.489) 109.61,14.2 ; 109.585,51.2 109.935,51.2 ; 109.585,51.2 109.935,51.2 ; 109.61,14.2 110.21,14.2 ; 109.61,14.2 110.21,14.2 ; 109.935,51.2 110.285,51.2 ; 109.935,51.2 110.285,51.2 ; 110.21,14.2 129.99,14.2 ; 110.21,14.2 129.99,14.2 ; 110.285,51.2 130.05,51.199 ; 110.285,51.2 130.05,51.199 ; 129.99,14.2 cw(c130.047,13.049) 131.2,13.049 ; 129.99,14.2 cw(c130.047,13.049) 131.2,13.049 ; 130.05,51.199 ccw(c130.05,52.35) 131.2,52.4 ; 130.05,51.199 ccw(c130.05,52.35) 131.2,52.4 ; 131.2,0.4 131.2,13.049 ; 131.2,0.4 181.2,0.4 ; 131.2,0.4 131.2,13.049 ; 131.2,0.4 181.2,0.4 ; 131.2,52.4 131.2,75.4 ; 131.2,52.4 131.2,75.4 ; 131.2,75.4 181.2,75.4 ; 131.2,75.4 181.2,75.4 ; 181.2,0.4 181.2,75.4 ; 181.2,0.4 181.2,75.4

## Silkscreen, mask and mechanical layers (free items; w line width, h text height)
F.SilkS:
  text "AYDIN GOKCE" at 140.972,13.15 h1
  text "XEM7310 CARRIER REV1" at 141.621,9.97 h1
  text "12 DEC 2023" at 140.999,9.95 h1

## Text inside footprints (layer, text, board x,y; h text height)
U1: F.SilkS "u" at 129.597,45.392 h1 r270
U2: F.Fab "*" at 114.261,48.119 h1; F.Fab "*" at 114.261,48.119 h1; F.SilkS "*" at 114.341,47.919 h1
U3: F.Fab "*" at 122.61,33.145 h1 r90; F.Fab "*" at 122.61,33.145 h1 r90; F.SilkS "*" at 121.413,31.837 h1 r90